# Altium PCB mcu.PcbDoc
Units mm, origin at the board's own origin, x right, y up, seen from the top; angles counter-clockwise.
Board outline 96 x 26 mm, 2 copper layers (Top Layer, Bottom Layer); 24 components, 21 nets, 111 pads, 61 vias.
Unrouted connection lines stored in the file: 17.
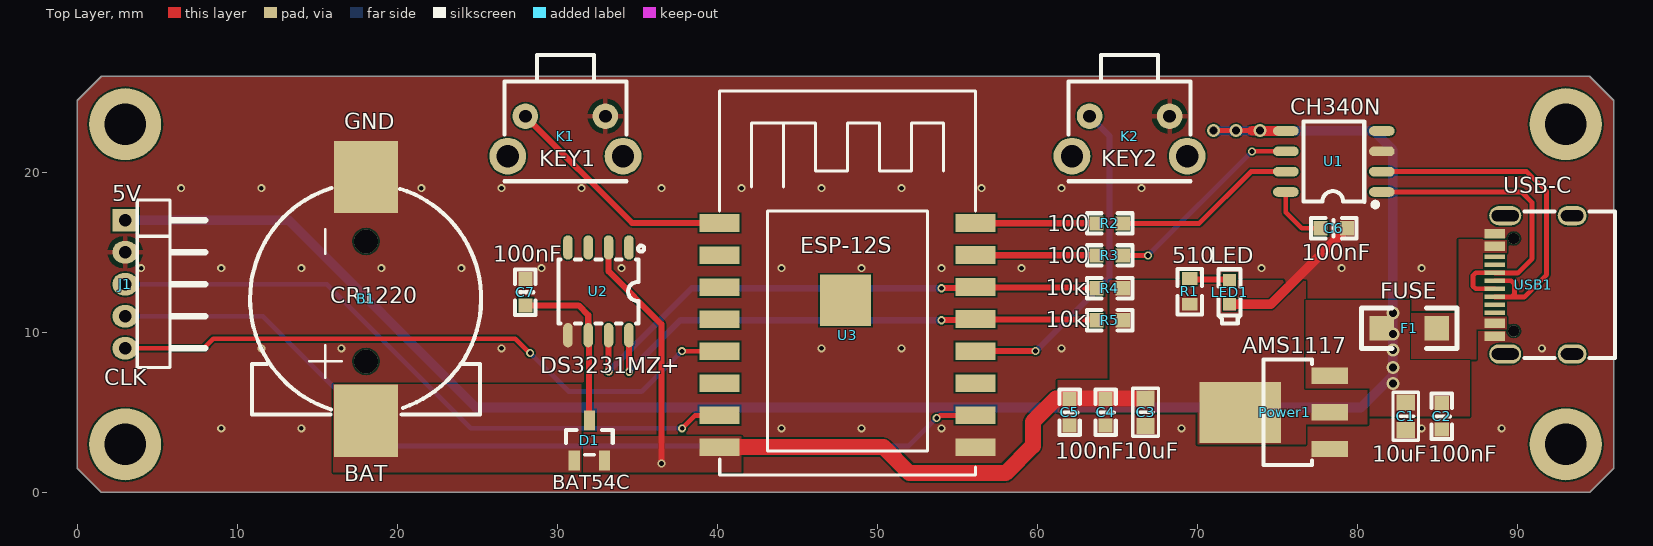
[diagram p0: Top Layer view]
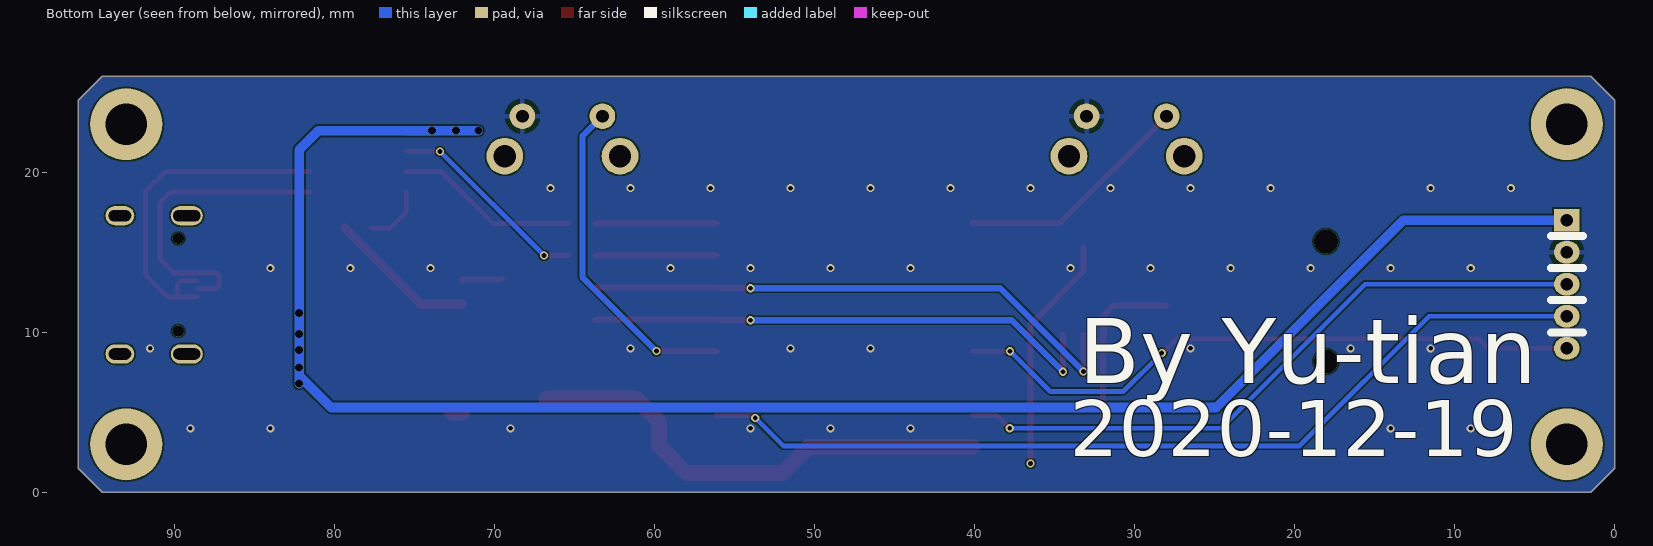
[diagram p1: Bottom Layer view, seen from below]
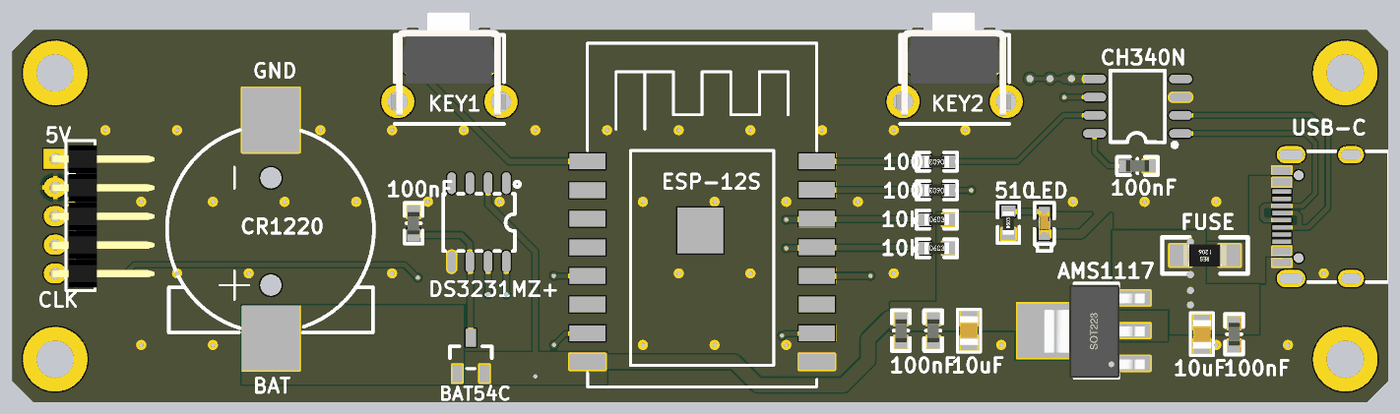
[diagram p2: 3D render of the assembled board from above, using the file's embedded part models]

## Layer stack, top to bottom
Top Solder: solder mask 0.0102, Solder Resist, Dk 3.5
Top Layer: signal copper 0.0356
Dielectric 1: dielectric 0.32, FR-4, Dk 4.8
Bottom Layer: signal copper 0.0356
Bottom Solder: solder mask 0.0102, Solder Resist, Dk 3.5

## Board outline
1.5,0 0,1.5 0,24.5 1.5,26 94.5,26 96,24.5 96,1.5 94.5,0

## Design rules (kind name [scope] priority, off if disabled: settings)
Clearance [All] p1: gap=0.1 ignorepadtopadclearanceinfootprint=FALSE
HoleSize [All] p1: absolutevalues=TRUE maxlimit=5 minlimit=0.025 maxpercent=80.000 minpercent=20.000
HoleToHoleClearance [All] p1: gap=0.2 allowstackedmicrovias=TRUE
MinimumSolderMaskSliver [All] p1: minsoldermaskwidth=0.01
PolygonConnect PolygonConnect_2 [InNet('VIN')] p1: connectstyle=Direct reliefconductorwidth=0.254 reliefentries=4 polygonreliefangle="90 Angle" airgapwidth=0.254
PolygonConnect PolygonConnect_1 [IsVia] p2: connectstyle=Direct reliefconductorwidth=0.254 reliefentries=4 polygonreliefangle="90 Angle" airgapwidth=0.254
PolygonConnect [All] p3: thpad.connectstyle=Relief thpad.reliefconductorwidth=0.3 thpad.reliefentries=4 thpad.polygonreliefangle="90 Angle" thpad.airgapwidth=0.3 smdpad.connectstyle=Direct smdpad.reliefconductorwidth=0.2 smdpad.reliefentries=4 smdpad.polygonreliefangle="90 Angle" smdpad.airgapwidth=0.2 via.connectstyle=Relief via.reliefconductorwidth=0.2 via.reliefentries=4 via.polygonreliefangle="90 Angle" via.airgapwidth=0.2
RoutingVias [All] p1: holewidth=0.3 width=0.5 viastyle="Through Hole" minholewidth=0.3 minwidth=0.5 maxholewidth=0.711 maxwidth=1.27
SilkToSilkClearance [All] p1: silktosilkclearance=0
SilkToSolderMaskClearance [IsPad] p1: minsilkscreentomaskgap=0 clearancetoexposedcopper=TRUE
SolderMaskExpansion [All] p1: expansion=0.102 istentingtop=FALSE
Width Width_VIN [InNet('VIN')] p1: maxlimit=10 minlimit=0.254 preferedwidth=1
Width Width_5V [InNet('5V')] p2: maxlimit=5 minlimit=0.2 preferedwidth=0.5
Width Width_3V3 [InNet('3V3')] p3: maxlimit=5 minlimit=0.2 preferedwidth=0.35
Width Width_1 [All] p4: maxlimit=1 minlimit=0.2 preferedwidth=0.25
25 further rules are at their usual default settings.

## Components (designator, comment, footprint, x,y, rotation, side; value= is the part's Value field where it differs from the comment)
B1 "CR1220-2" CR1220 18,12 r90 top
C1 "10uF" 0805c 83,4.75 r90 top
C2 "100nF" 0603C 85.25,4.75 r90 top
C3 "10uF" 0805c 66.75,5 r90 top
C4 "100nF" 0603C 64.25,5 r90 top
C5 "100nF" 0603C 62,5 r90 top
C6 "0.1uF" 0603C 78.5,16.5 r0 top value=100pF
C7 "0.1uF" 0603C 28,12.5 r270 top value=100pF
D1 "BAT54C_C556168" BAT54C 32.064,2.966 r270 top
F1 "0.75A" 1206 84.929,10.25 r180 top
J1 "Pin HDR1X5" "Pin HDR1X5/2mm-W" 3,17 r270 top
K1 "KEY" DIP-3X6X5_C 33,23.5 r180 top
K2 "KEY" DIP-3X6X5_C 68.25,23.5 r180 top
LED1 "LED_RED" 0603LED_R 72,13.25 r270 top
Power1 "AMS1117" SOT223 78.25,5 r90 top
R1 "510" 0603R#1 69.5,11.75 r90 top
R2 "100" 0603R#2 64.5,16.8 r180 top value=1K
R3 "100" 0603R#2 64.5,14.8 r180 top value=1K
R4 "10k" 0603R#2 64.5,12.75 r0 top value=1K
R5 "10k" 0603R#2 64.5,10.75 r0 top value=1K
U1 "CH330N" CH340N 78.5,20.75 r90 top
U2 "DS3231MZ+" DS3231MZ+ 32.5,12.5 r180 top
U3 "ESP-12S" ESP-12S 48,12 r0 top
USB1 "KH-TYPE-C-16P" Type-c 92,13 r90 top

## Footprints (in the part's own frame and the unit in brackets; to place one, negate y for a bottom-side part, rotate by r counter-clockwise, add the part's x,y. Pads: shape width x height; smd on the part's side, far side on the other; paste and mask are expansions set on the pad)
0603C [mil] "Chip Resistor, 2-Leads, Body 1.6x0.8mm, IPC Medium Density"
  rect 35x35 smd: 1(-32.5,0) 2(32.5,0)
  silkscreen extent -56,-25 56,25, body extent -31,-16 31,15, height 18
0603LED_R [mm]
  rect 0.8x0.8 smd: 1(0,0) 2(1.5,0)
  silkscreen extent -0.69,-0.69 2.69,0.69, body extent -0.06,-0.4 1.54,0.4, height 0.6
0603R#1 [mm]
  rect 0.8x0.965 smd: 1(0,0) 2(1.6,0)
  silkscreen extent -0.64,-0.76 2.21,0.76, body extent -0.04,-0.41 1.56,0.41, height 0.45
0603R#2 [mm] "10mil丝印"
  rect 0.889x0.889 smd: 1(-0.826,0) 2(0.826,0)
  silkscreen extent -1.42,-0.64 1.42,0.64, body extent -0.85,-0.4 0.85,0.4, height 0.56
0805c [mm]
  rect 1x1.14 smd: 1(-0.85,0) 2(0.85,0)
  silkscreen extent -1.5,-0.8 1.5,0.8, body extent -1,-0.62 1,0.62, height 0.8
1206 [mil]
  rect 60x60 smd: 1(0,0) 2(135,0)
  silkscreen extent -50,-50 185,50, body extent 9,-31 127,31, height 22
BAT54C [mm]
  rect 1.25x0.7 smd: 1(0.965,-1.014) 2(0.965,0.886) 3(-1.534,-0.064)
  silkscreen extent -0.93,-1.52 0.62,1.4
CH340N [mm]
  oval 0.6x1.598 smd: 1(-1.985,-3.011) 2(-0.715,-3.011) 3(0.555,-3.011) 4(1.825,-3.011) 5(1.825,2.989) 6(0.555,2.989) 7(-0.715,2.989) 8(-1.985,2.989)
  silkscreen extent -2.92,-2.75 2.42,1.89
CR1220 [mm]
  rect 4.5x4 smd: 1(-7.529,-0.045) 2(7.711,-0.045)
  round 1.5 hole 1.5 unplated: ""(-3.82,-0.045) ""(3.673,-0.045)
  silkscreen extent -7.13,-7.24 7.01,7.2
DIP-3X6X5_C [mm]
  round 2.3 hole 1.4: 0(-1.1,2.5) 0(6.1,2.5)
  round 1.6 hole 0.8: 1(0,0) 3(5,0)
  silkscreen extent -1.31,-3.81 6.31,4.06, body extent -1.44,-3.75 6.56,3.5, height 4.45
DS3231MZ+ [mm]
  oval 0.6x1.518 smd: 1(-1.968,-2.797) 2(-0.698,-2.797) 3(0.572,-2.797) 4(1.842,-2.797) 5(1.841,2.683) 6(0.571,2.683) 7(-0.698,2.683) 8(-1.969,2.683)
  silkscreen extent -2.92,-2.91 2.44,1.94
ESP-12S [mm]
  rect 2.5x1.1 smd: 1(-7.874,4.826) 2(-7.873,2.815) 3(-7.872,0.822) 4(-7.873,-1.187) 5(-7.874,-3.183) 6(-7.873,-5.179) 7(-7.874,-7.183) 8(-7.873,-9.179) 9(8.129,-9.172) 10(8.128,-7.174) 11(8.129,-5.174) 12(8.128,-3.174) 13(8.129,-1.172) 14(8.13,0.827) 16(8.128,4.826)
  rect 2.499x1.1 smd: 15(8.128,2.826)
  rect 3.2x3.2 smd: 17(0,0)
  silkscreen extent -7.87,-10.92 8.13,13.08
"Pin HDR1X5/2mm-W" [mm]
  rect 1.4x1.6 hole 0.8: 1(0,0)
  oval 1.4x1.6 hole 0.8: 2(2,0) 3(4,0) 4(6,0) 5(8,0)
  silkscreen extent -1.27,0.75 9.2,5, body extent -0.95,-0.32 9,6.93, height 2
SOT223 [mil]
  rect 40x90 smd: 1(-90,0) 2(0,0) 3(90,0)
  rect 150x200 smd: 2(0,220)
  silkscreen extent -130,43 130,163, body extent -130,-30 126,246, height 65
Type-c [mm]
  oval 1.2x2 hole 0.7 slot 1.7 at 90 deg: 1(-4.357,2.781) 2(4.283,2.781)
  oval 1.2x1.8 hole 0.7 slot 1.4 at 90 deg: 3(-4.357,-1.399) 4(4.283,-1.399)
  rect 0.3x1.3 smd: A1(-3.387,3.431) A4(-2.587,3.431) A5(-1.287,3.431) A6(-0.287,3.431) A7(0.213,3.431) A8(1.213,3.431) A9(2.513,3.431) A12(3.313,3.431) B1(3.013,3.431) B4(2.213,3.431) B5(1.713,3.431) B6(0.713,3.431) B7(-0.787,3.431) B8(-1.787,3.431) B9(-2.287,3.431) B12(-3.087,3.431)
  round 0.7 hole 0.7 unplated: ""(-2.927,2.251) ""(2.853,2.251)
  silkscreen extent -4.61,-4.06 4.53,1.59

## Part data
B1: BOM_Manufacturer=Q&J, BOM_Manufacturer Part=CR1220-2, BOM_Supplier=LCSC, BOM_Supplier Part=C70381, image=//image.lceda.cn/szlcsc/C70381.jpg, spicePre=B, spiceSymbolName=CR1220-2
C1 C2 C3 C4 C5: library part CAP, "无极性电容"
C6 C7: library part Cap, "Capacitor", LatestRevisionDate=17-Jul-2002, LatestRevisionNote="Re-released for DXP Platform.", PackageDescription="Radial Cap, Thru-Hole; 2 Leads; 0.3 in Pin Spacing", PackageReference=RAD-0.3, Published=8-Jun-2000, Publisher="Altium Limited"
D1: BOM_Manufacturer="Slkor(SLKORMICRO Elec.)", BOM_Manufacturer Part=BAT54C, BOM_Supplier=LCSC, BOM_Supplier Part=C556168, Contributor=LCSC, spicePre=D, spiceSymbolName=BAT54C_C556168
F1: library part FUSE
LED1: library part LED, "Typical RED, GREEN, YELLOW, AMBER GaAs LED", LatestRevisionDate=17-Jul-2002, LatestRevisionNote="Re-released for DXP Platform.", PackageDescription="SM LED; 2 Flat Leads", PackageReference=3.2X1.6X1.1, PackageVersion=Feb-2002, Published=8-Jun-2000, Publisher="Altium Limited"
Power1: "三端稳压芯片"
R1: library part RES
R2 R3 R4 R5: library part Res1, "Resistor", LatestRevisionDate=17-Jul-2002, LatestRevisionNote="Re-released for DXP Platform.", PackageDescription="Axial Device, Thru-Hole; 2 Leads; 0.3 in Pin Spacing", PackageReference=AXIAL-0.3, Published=8-Jun-2000, Publisher="Altium Limited"
U1: BOM_Manufacturer=WCH, BOM_Manufacturer Part=CH330N, BOM_Supplier=LCSC, BOM_Supplier Part=C108996, spicePre=U, spiceSymbolName=CH330N
U2: BOM_JLCPCB SMD=Yes, BOM_Manufacturer=MAXIM, BOM_Manufacturer Part=DS3231MZ+, BOM_Supplier=LCSC, BOM_Supplier Part=C107410, SMT Type=Extend, spicePre=U, spiceSymbolName=DS3231MZ+
U3: BOM_Manufacturer=Ai-Thinker, BOM_Manufacturer Part=ESP-12S, BOM_Supplier=LCSC, BOM_Supplier Part=C82898, Contributor=LCSC, spicePre=U, spiceSymbolName=ESP-12S
USB1: BOM_Manufacturer="Shenzhen Kinghelm Elec", BOM_Manufacturer Part=KH-TYPE-C-16P, BOM_Supplier=LCSC, BOM_Supplier Part=C709357, Contributor=LCSC, spicePre=U, spiceSymbolName=KH-TYPE-C-16P

## Free pads (board coordinates)
  round 4.5 hole 2.6: 2(3,23) 2(3,3) 2(93,3) 2(93,23)

## Via types
v1: diameter 0.5, hole 0.3, Top Layer to Bottom Layer, 41 vias
v2: diameter 0.508/0.508 (per signal layer), hole 0.305, Top Layer to Bottom Layer, tented both sides, 8 vias
v3: diameter 0.8/0.508 (per signal layer), hole 0.5, Top Layer to Bottom Layer, tented both sides, 8 vias
v4: diameter 0.5/0.508 (per signal layer), hole 0.3, Top Layer to Bottom Layer, tented both sides, 4 vias

## Nets (pads, with @x,y where several pads share a name; then routed paths per layer and width w, separated by ;. In a path a pad name is that pad's centre, name@x,y a point inside that pad or via, vN(x,y) a via of type N, cw(c..) or ccw(c..) an arc to the next point about the centre after c; other vN are vias at no path point)
3V3: C3.2 C4.2 C5.2 D1.2 Power1.2 R1.1 R4.2 R5.2 U2.2 U3.8 | length 46
  Top Layer w0.381: U2.2 33.199,13.801 36.5,10.5 v2(36.5,1.8) 36.5,2.25
  Top Layer w1: U3.8 50.379,2.821 52,1.2 58,1.2 59.7,2.9 59.7,4.4 61.15,5.85 64.25,5.85 C3.2 ; Power1.2@72.027,5 Power1.2@72.662,5
5V: C1.2 C2.2 F1.2 J1.1 Power1.3 U1.5 | length 115.7
  Top Layer w0.3: v3(71,22.6) v3(72.4,22.6) 73.4,22.6
  Top Layer w0.6: 73.4,22.6 73.954,22.6 73.979,22.575 75.012,22.575 U1.5
  Bottom Layer w0.6: J1.1 13.2,17 24.9,5.3 80.2,5.3 82.2,7.3 ; v3(71,22.6) v3(72.4,22.6) v3(73.9,22.6) 81,22.6 82.2,21.4 v3(82.2,11.2) v3(82.2,9.9) v3(82.2,8.9) v3(82.2,7.8) 82.2,7.3 ; v3(82.2,6.8) 82.2,7.3
CLK: J1.5 U3.5 | length 39.9
  Top Layer w0.3: J1.5 7.9,9 8.5,9.6 27.369,9.6 28.269,8.7 v4(28.3,8.7) ; v4@37.7,8.9 v4(37.783,8.817) U3.5
  Bottom Layer w0.3: v4(28.3,8.7) 30.7,6.3 35.266,6.3 v4(37.783,8.817)
CS: J1.4 U3.10 | length 57.3
  Top Layer w0.3: v4(53.7,4.646) 53.754,4.646 53.908,4.8 56.102,4.8 U3.10
  Bottom Layer w0.3: J1.4 11.6,11 19.7,2.9 51.954,2.9 v4(53.7,4.646)
DIN: J1.3 U3.7 | length 41.2
  Top Layer w0.3: v4(37.8,4) 38.602,4.802 40.111,4.802 U3.7
  Bottom Layer w0.3: J1.3 15.6,13 24.6,4 v4(37.8,4)
GND: B1.2 C1.1 C2.1 C3.1 C4.1 C5.1 C6.2 C7.1 J1.2 K1.1 K2.1 LED1.2 Power1.1 U1.3 U2.5 U3.9 USB1.A1 USB1.A12 USB1.B1 USB1.B12 | length 9.3
  Top Layer w0.6: LED1.2 74.575,11.75 C6.2
  other v1: 9,4 14,4 44,4 49,4 54,4 69,4 84,4 89,4 11.5,9 16.5,9 26.5,9 46.5,9 51.5,9 61.5,9 91.5,9 4,14 9,14 14,14 19,14 24,14 29,14 34,14 44,14 49,14 54,14 59,14 74,14 79,14 84,14 6.5,19 11.5,19 21.5,19 26.5,19 31.5,19 36.5,19 41.5,19 46.5,19 51.5,19 56.5,19 61.5,19 66.5,19
NetB1_1: B1.1 D1.1
NetC6_1: C6.1 U1.8 | length 3.8
  Top Layer w0.3: U1.8 75.511,17.489 76.5,16.5 C6.1
NetC7_2: C7.2 D1.3 U2.6 | length 10.8
  Top Layer w0.381: C7.2 31.325,11.675 31.929,11.071 U2.6 31.964,9.781 31.964,4.536 D1.3
NetF1_1: F1.1 USB1.A4 USB1.A9 USB1.B4 USB1.B9
NetK1_3: K1.3 U3.1 | length 14.9
  Top Layer w0.381: K1.3 34.674,16.826 U3.1
NetK2_3: K2.3 U3.12 | length 20.9
  Top Layer w0.381: U3.12 v2(59.874,8.826) v2@59.9,8.8
  Bottom Layer w0.381: v2(59.874,8.826) 64.5,13.451 64.5,22.25 K2.3
NetLED1_1: LED1.1 R1.2 | length 2.5
  Top Layer w0.381: R1.2 69.55,13.3 71.95,13.3 LED1.1
NetR2_1: R2.1 U1.7 | length 11.5
  Top Layer w0.3: R2.1 70.1,16.8 73.335,20.035 U1.7
NetR3_1: R3.1 U1.6 | length 12.9
  Top Layer w0.3: R3.1 v2(66.9,14.8) ; v2(73.4,21.3) 73.405,21.305 U1.6
  Bottom Layer w0.3: v2(66.9,14.8) v2(73.4,21.3)
NetU1_1: U1.1 USB1.A6 USB1.B6 | length 19.4
  Top Layer w0.3: U1.1 90.235,18.765 90.9,18.1 90.9,14.6 90,13.7 88.582,13.7 USB1.B6 88.069,13.713 87.376,13.713 87.2,13.537 87.2,12.889 87.376,12.713 USB1.A6
NetU1_2: U1.2 USB1.A7 USB1.B7 | length 23
  Top Layer w0.3: U1.2 90.565,20.035 91.8,18.8 91.8,13.6 90.4,12.2 88.582,12.2 USB1.B7 89.613,12.213 89.8,12.4 89.8,13 89.587,13.213 USB1.A7
RXD: R2.2 U3.16 | length 7.6
  Top Layer w0.381: U3.16 56.141,16.813 63.662,16.813 R2.2
SCL: R5.1 U2.8 U3.13 | length 32.9
  Top Layer w0.381: U2.8 v2(34.469,7.531) v2@34.5,7.5 ; v2(54,10.75) 54.024,10.774 56.076,10.774 56.09,10.789 63.636,10.789 R5.1
  Bottom Layer w0.381: v2(34.469,7.531) 37.687,10.75 v2(54,10.75)
SDA: R4.1 U2.7 U3.14 | length 35
  Top Layer w0.381: U2.7 v2(33.198,7.552) v2@33.25,7.5 ; v2(54,12.75) 54.024,12.774 56.077,12.774 56.091,12.789 63.636,12.789 R4.1
  Bottom Layer w0.381: v2(33.198,7.552) 38.397,12.75 v2(54,12.75)
TXD: R3.2 U3.15 | length 7.6
  Top Layer w0.381: U3.15 56.141,14.813 63.662,14.813 R3.2
pads on no net: B1. K1.0 K2.0 U1.4 U2.1 U2.3 U2.4 U3.2 U3.3 U3.4 U3.6 U3.11 U3.17 USB1. USB1.1 USB1.2 USB1.3 USB1.4 USB1.A5 USB1.A8 USB1.B5 USB1.B8

## Polygon pours and split planes (outlines as drawn)
GND on Top Layer "GND_L02_P-001" (solid, remove dead copper, pour order 11): 1.5,26 0,24.5 0,1.5 1.5,0 94.5,0 96,1.5 96,24.5 94.5,26
NetF1_1 on Top Layer "GND_L02_P-001" (solid, remove dead copper, pour order 9): 83.25,8.25 83.3,8.3 87.4,8.3 87.4,10.2 89.3,10.2 89.3,15.8 86.3,15.8 86.3,11.2 83.25,11.2
3V3 on Top Layer "GND_L02_P-001" (solid, remove dead copper, pour order 6): 64.5,13.25 76.75,13.25 76.75,6.5 80.6,6.5 80.6,4.25 76.75,4.25 76.75,3 70,3 70,5 61.25,5 61.25,7 64.5,7
5V on Top Layer "GND_L02_P-001" (solid, remove dead copper, pour order 5): 76.75,6.5 80.75,6.5 80.75,4.75 87,4.75 87,8.25 83.25,8.25 83.25,12 76.75,12
no net on Top Layer "GND_L02_P-001" (solid, remove dead copper, pour order 2): 32.95,2.001
3V3 on Top Layer "GND_L02_P-001" (solid, remove dead copper, pour order 1): 31.5,3.5 41.5,3.5 41.5,1.25 31.5,1.25
NetB1_1 on Top Layer "GND_L02_P-001" (solid, remove dead copper, pour order 0): 16,6.75 31.5,6.75 31.5,1.25 16,1.25
GND on Bottom Layer "GND_L02_P-001" (solid, remove dead copper, pour order 12): 0,24.5 1.5,26 94.5,26 96,24.5 96,1.5 94.5,0 1.5,0 0,1.5

## Silkscreen, mask and mechanical layers (free items; w line width, h text height)
Top Overlay:
  text "CH340N" at 75.8,23.6 h1
  text "GND" at 16.68,22.68 h1
  text "KEY1" at 28.88,20.38 h1
  text "KEY2" at 63.98,20.38 h1
  text "USB-C" at 89.1,18.7 h1
  text "5V" at 2.18,18.18 h1
  text "100" at 60.6,16.3 h1
  text "ESP-12S" at 45.18,14.93 h1
  text "100nF" at 76.5,14.5 h1
  text "100nF" at 26,14.4 h1
  text "100" at 60.6,14.3 h1
  text "510" at 68.4,14.3 h1
  text "LED" at 70.8,14.3 h1
  text "10k" at 60.5,12.3 h1
  text "FUSE" at 81.4,12.1 h1
  text "CR1220" at 15.8,11.8 h1
  text "10k" at 60.5,10.3 h1
  text "AMS1117" at 72.8,8.7 h1
  text "DS3231MZ+" at 28.93,7.43 h1
  text "CLK" at 1.68,6.68 h1
  text "100nF" at 61.1,2.1 h1
  text "10uF" at 65.4,2.1 h1
  text "10uF" at 80.9,1.9 h1
  text "100nF" at 84.4,1.9 h1
  text "BAT" at 16.68,0.68 h1
  text "BAT54C" at 29.68,0.18 h0.9
Bottom Overlay:
  text "By Yu-tian" at 33.5,5.476 h7
  text "2020-12-19" at 34.044,1.083 h6
Mechanical 1:
  the board outline again, w0.254